# Altium PCB gps_imu2.PcbDoc
Units mm, origin at the board's own origin, x right, y up, seen from the top; angles counter-clockwise.
Board outline 89.6 x 89.6 mm, 2 copper layers (Top Layer, Bottom Layer); 38 components, 27 nets, 161 pads, 0 vias.
Unrouted connection lines stored in the file: 95.
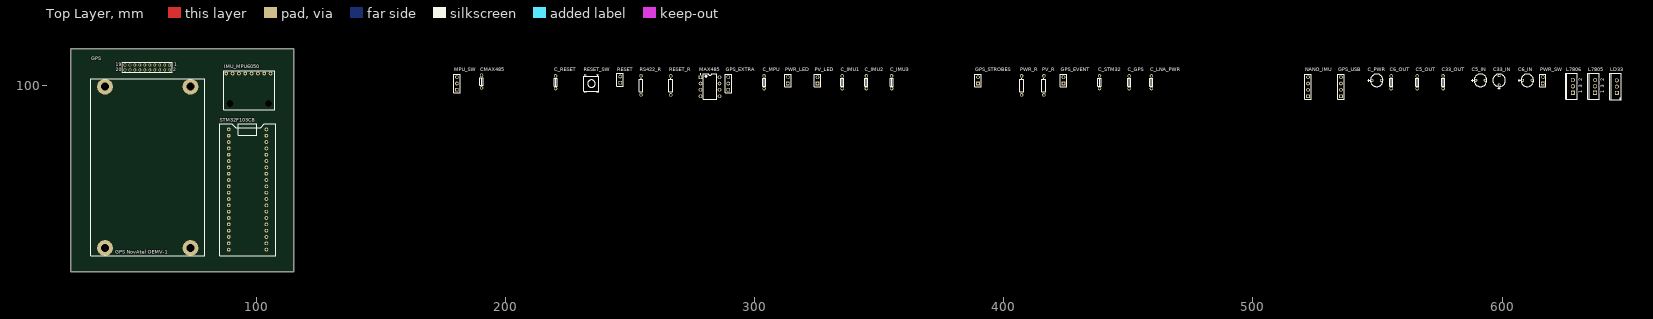
[diagram p0: Top Layer view]
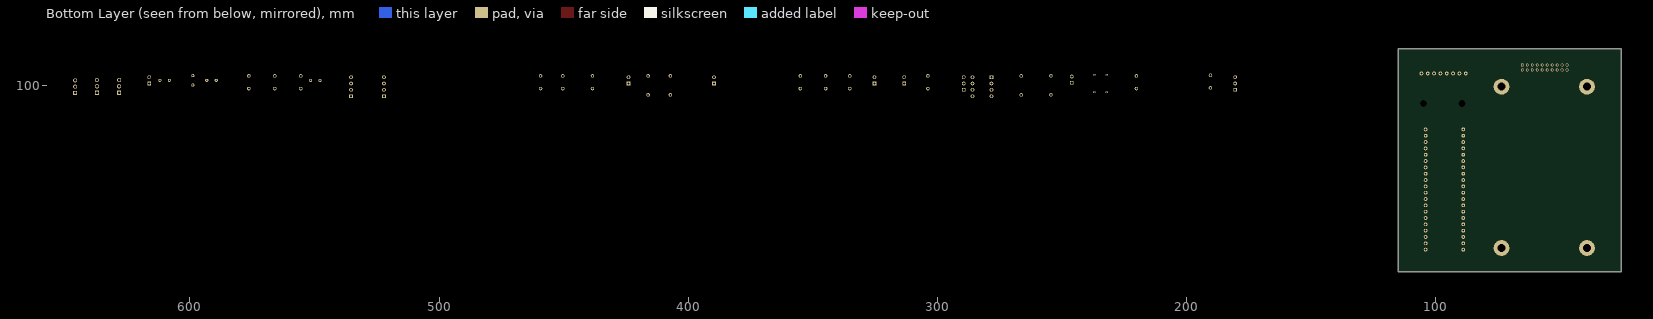
[diagram p1: Bottom Layer view, seen from below]

## Layer stack, top to bottom
Top Solder: solder mask 0.0102, Solder Resist, Dk 3.5
Top Layer: signal copper 0.0356
Dielectric 1: dielectric 0.32, FR-4, Dk 4.8
Bottom Layer: signal copper 0.0356
Bottom Solder: solder mask 0.0102, Solder Resist, Dk 3.5

## Board outline
25.4,25.4 115,25.4 115,115 25.4,115

## Design rules (kind name [scope] priority, off if disabled: settings)
Clearance [All] p1: gap=0.254 ignorepadtopadclearanceinfootprint=FALSE except(0: Arc-Hole Track-Hole SMDPad-Hole THPad-Hole Via-Hole Fill-Hole Poly-Hole Region-Hole Text-Hole)
PolygonConnect [All] p1: connectstyle=Relief reliefconductorwidth=0.254 reliefentries=4 polygonreliefangle="90 Angle" airgapwidth=0.254
RoomDefinition Sheet1 [InComponentClass('Sheet1')] p1: confinementstyle=ConfineIn formatcopy=TRUE lockcomponents=FALSE outline 178.943,27.051 649.351,27.051 649.351,107.823 178.943,107.823
RoutingVias [All] p1: holewidth=0.711 width=1.27 viastyle="Through Hole" minholewidth=0.711 minwidth=1.27 maxholewidth=0.711 maxwidth=1.27
SolderMaskExpansion [All] p1: expansion=0.102
Width [All] p1: maxlimit=0.254 minlimit=0.254 preferedwidth=0.254
30 further rules are at their usual default settings.

## Components (designator, comment, footprint, x,y, rotation, side; value= is the part's Value field where it differs from the comment)
C5_IN "10uF" Capacitor1 589.407,102.235 r0 top
C5_OUT "100nF" C_NANO_HOLES 565.912,98.933 r90 top
C6_IN "10uF" Capacitor1 608.203,102.235 r0 top
C6_OUT "100nF" C_NANO_HOLES 555.498,98.933 r90 top
C33_IN "10uF" Capacitor1 598.805,100.33 r90 top
C33_OUT "100nF" C_NANO_HOLES 576.326,98.933 r90 top
C_GPS "100nF" C_NANO_HOLES 450.342,98.933 r90 top
C_IMU1 "100nF" C_NANO_HOLES 335.153,98.933 r90 top
C_IMU2 "100nF" C_NANO_HOLES 344.805,98.933 r90 top
C_IMU3 "100nF" C_NANO_HOLES 354.965,98.933 r90 top
C_LNA_PWR "100nF" C_NANO_HOLES 459.232,98.933 r90 top
C_MPU "100nF" C_NANO_HOLES 303.784,98.933 r90 top
C_PWR "10uF" Capacitor1 547.751,102.235 r0 top
C_RESET "100nF" C_NANO_HOLES 220.091,98.933 r90 top
C_STM32 "100nF" C_NANO_HOLES 438.404,98.933 r90 top
CMAX485 "100nF" C_NANO_HOLES 190.373,99.187 r90 top
GPS "Header 10X2" GPS_BOARD 46.228,105.41 r0 top
GPS_EVENT "EVENT" HDR1X2 423.926,100.965 r90 top
GPS_EXTRA "EXTRA" HDR1X3 289.433,98.425 r90 top
GPS_STROBES "STROBES" HDR1X2 389.636,100.965 r90 top
GPS_USB "USB" HDR1X4 535.305,95.885 r90 top
IMU_MPU6050 "MPU6050" MPU6050 87.92,105 r270 top
L7805 "L7805ACV" TO220ABN 637.286,99.822 r90 top
L7806 "L7806CV" TO220ABN 628.396,99.822 r90 top
LD33 "LD33V" T03B 646.049,99.695 r90 top
MAX485 "MAX485CPA" PA8 282.067,99.695 r0 top
MPU_SW "Header 3" HDR1X3 180.467,98.425 r90 top
NANO_IMU "Header 4" HDR1X4 522.097,95.885 r90 top
PV_LED "PV" HDR1X2 325.247,100.965 r90 top
PV_R "180" AXIAL-0.3 416.052,100.203 r90 top
PWR_LED "PWR" HDR1X2 313.309,100.965 r90 top
PWR_R "180" AXIAL-0.3 407.162,100.203 r90 top
PWR_SW "Header 2" HDR1X2 616.331,100.965 r90 top
RESET "Header 2" HDR1X2 245.999,101.219 r90 top
RESET_R "4k7" AXIAL-0.3 266.319,100.203 r90 top
RESET_SW "SW-PB" PUSHBUTTON 237.49,97.917 r90 top
RS422_R "120" AXIAL-0.3 254.381,100.203 r90 top
STM32F103C8 "STM32F103C8 Blue Pill" STM32F103C8 85.2,31.74 r0 top

## Footprints (in the part's own frame and the unit in brackets; to place one, negate y for a bottom-side part, rotate by r counter-clockwise, add the part's x,y. Pads: shape width x height; smd on the part's side, far side on the other; paste and mask are expansions set on the pad)
AXIAL-0.3 [mm] "Axial Device, Thru-Hole; 2 Leads; 0.3 in Pin Spacing"
  round 1.4 hole 0.85: 1(-3.81,0) 2(3.81,0)
  silkscreen extent -2.77,-0.76 2.77,0.76
C_NANO_HOLES [mm] "C_NANO com furos maiores"
  round 1.4 hole 0.85: 1(0,0) 2(5.08,0)
  silkscreen extent 1.02,-0.63 4.06,0.64
Capacitor1 [mil]
  round 50 hole 28: 1(0,0) 2(150,0)
  silkscreen extent -69,-100 175,100
GPS_BOARD [mm]
  rect 1.18x1.18 hole 0.71: 1(18.991,2.991)
  round 1.18 hole 0.71: 2(18.991,0.991) 3(16.991,2.991) 4(16.991,0.991) 5(14.991,2.991) 6(14.991,0.991) 7(12.991,2.991) 8(12.991,0.991) 9(10.991,2.991) 10(10.991,0.991) 11(8.991,2.991) 12(8.991,0.991) 13(6.991,2.991) 14(6.991,0.991) 15(4.991,2.991) 16(4.991,0.991) 17(2.991,2.991) 18(2.991,0.991) 19(0.991,2.991) 20(0.991,0.991)
  round 6.35 hole 3.175: 21(27.305,-5.715) 22(-6.985,-5.715) 23(-6.985,-70.485) 24(27.305,-70.485)
  silkscreen extent -12.7,-73.66 33.02,3.99
HDR1X2 [mm] "Connector; Header; 2 Position"
  rect 1.5x1.5 hole 0.9: 1(0,0)
  round 1.5 hole 0.9: 2(2.54,0)
  silkscreen extent -1.27,-1.27 3.81,1.27
HDR1X3 [mm] "Connector; Header; 3 Position"
  rect 1.5x1.5 hole 0.9: 1(0,0)
  round 1.5 hole 0.9: 2(2.54,0) 3(5.08,0)
  silkscreen extent -1.27,-1.27 6.35,1.27
HDR1X4 [mm] "Connector; Header; 4 Position"
  rect 1.5x1.5 hole 0.9: 1(0,0)
  round 1.5 hole 0.9: 2(2.54,0) 3(5.08,0) 4(7.62,0)
  silkscreen extent -1.27,-1.27 8.89,1.27
MPU6050 [mil]
  round 60 hole 30: 0(0,0) 1(0,100) 2(0,200) 3(0,300) 4(0,400) 5(0,500) 6(0,600) 7(0,700)
  round 60 hole 110.24: 9(472.44,59.06) 10(472.44,669.29)
  silkscreen extent -39,-39 571,768
PA8 [mm] "DIP, 8-Leads, Row Spacing 7.62mm, Pitch 2.54mm, Body 9.38x7.24mm"
  rect 1.5x1.5 hole 0.9: 1(-3.81,3.81)
  round 1.5 hole 0.9: 2(-3.81,1.27) 3(-3.81,-1.27) 4(-3.81,-3.81) 5(3.81,-3.81) 6(3.81,-1.27) 7(3.81,1.27) 8(3.81,3.81)
  silkscreen extent -3.93,-5.15 2.65,5.23, body extent -3.6,-5.15 3.6,5.15, height 4.58
PUSHBUTTON [mm]
  oval 0.6x1 hole 0.5: 1(-0.5,5.5) 1(-0.5,0.5) 2(6.5,0.5) 2(6.5,5.5)
  silkscreen extent -0.5,0 6.5,6
STM32F103C8 [mil] "Blue Pill STM32F103C8"
  round 60 hole 30: 1(145.67,100) 2(145.67,200) 3(145.67,300) 4(145.67,400) 5(145.67,500) 6(145.67,600) 7(145.67,700) 8(145.67,800) 9(145.67,900) 10(145.67,1000) 11(145.67,1100) 12(145.67,1200) 13(145.67,1300) 14(145.67,1400) 15(145.67,1500) 16(145.67,1600) 17(145.67,1700) 18(145.67,1800) 19(145.67,1900) 20(145.67,2000) 21(740.16,100) 22(740.16,200) 23(740.16,300) 24(740.16,400) 25(740.16,500) 26(740.16,600) 27(740.16,700) 28(740.16,800) 29(740.16,900) 30(740.16,1000) 31(740.16,1100) 32(740.16,1200) 33(740.16,1300) 34(740.16,1400) 35(740.16,1500) 36(740.16,1600) 37(740.16,1700) 38(740.16,1800) 39(740.16,1900) 40(740.16,2000)
  silkscreen extent 0,0 886,2087
T03B [mm] "TO, Thru-Hole, Vertical, Heatsink Mounted; 3 In-Line Leads; Pitch 2.54 mm"
  rect 1.6x1.6 hole 1: 1(-2.54,0)
  round 1.6 hole 1: 2(0,0) 3(2.54,0)
  silkscreen extent -5.35,-1.85 5.35,2.85, body extent -5.4,-1.9 5.4,2.9, height 19.4
TO220ABN [mm] "TO, Thru-Hole, Vertical, Heatsink Mounted; 3 In-Line Leads; Pitch 2.54 mm; Pin sequence 1, 3, 2"
  rect 1.7x1.7 hole 1.1: 1(-2.54,0)
  round 1.7 hole 1.1: 2(2.54,0) 3(0,0)
  silkscreen extent -5.2,-1.7 5.2,2.9

## Part data
C5_IN C6_IN C33_IN C_PWR: library part "Cap Pol1", "Polarized Capacitor (Radial)", LatestRevisionDate=17-Jul-2002, LatestRevisionNote="Re-released for DXP Platform.", PackageDescription="Polarized Capacitor (Radial); 2 Leads", PackageReference=RB7.6-15, Published=8-Jun-2000, Publisher="Altium Limited"
C5_OUT C6_OUT C33_OUT C_GPS C_IMU1 C_IMU2 C_IMU3 C_LNA_PWR C_MPU C_RESET C_STM32 CMAX485: library part Cap, "Capacitor", LatestRevisionDate=17-Jul-2002, LatestRevisionNote="Re-released for DXP Platform.", PackageReference=RAD-0.3, Published=8-Jun-2000, Publisher="Altium Limited"
GPS: "Header, 10-Pin, Dual row", LatestRevisionDate=17-Jul-2002, LatestRevisionNote="Re-released for DXP Platform.", Publisher="Altium Limited"
GPS_EVENT GPS_STROBES: library part "Header 2", "Header, 2-Pin", LatestRevisionDate=17-Jul-2002, LatestRevisionNote="Re-released for DXP Platform.", Publisher="Altium Limited"
GPS_EXTRA: library part "Header 3", "Header, 3-Pin", LatestRevisionDate=17-Jul-2002, LatestRevisionNote="Re-released for DXP Platform.", Publisher="Altium Limited"
GPS_USB: library part "Header 4", "Header, 4-Pin", LatestRevisionDate=17-Jul-2002, LatestRevisionNote="Re-released for DXP Platform.", Publisher="Altium Limited"
IMU_MPU6050: library part Component_1
L7805: "Precision 1A Regulator", ComponentLink1Description="Manufacturer Link", ComponentLink1URL=http://www.st.com/, ComponentLink2Description=Datasheet, ComponentLink2URL=http://www.st.com/stonline/products/literature/ds/2144/l7805ab.pdf, DatasheetVersion=Nov-1999, LatestRevisionDate=17-Jul-2002, LatestRevisionNote="Re-released for DXP Platform.", Note="Tab is connected to pin 3 (GND).", PackageDescription="TO, Thru-Hole, Vertical, Heatsink Mounted; 3 In-Line Leads; Pitch 2.54 mm; Pin sequence 1, 3, 2", PackageReference=TO220ABN, PackageVersion=Jun-1998, Published=24-Aug-2001, Publisher="Altium Limited"
L7806: "Positive Voltage Regulator", ComponentLink1Description="Manufacturer Link", ComponentLink1URL=http://www.st.com/, DatasheetVersion=Dec-1998, LatestRevisionDate=17-Jul-2002, LatestRevisionNote="Re-released for DXP Platform.", Note="Tab is connected to pin 3 (GND).", PackageDescription="TO, Thru-Hole, Vertical, Heatsink Mounted; 3 In-Line Leads; Pitch 2.54 mm; Pin sequence 1, 3, 2", PackageReference=TO220ABN, PackageVersion=Jun-1998, Published=24-Aug-2001, Publisher="Altium Limited"
LD33: library part LM1117T-3.3, "800mA Low-Dropout Linear Regulator", DigiKeyPartNumber=LM1117T-3.3-ND, Manufacturer="National Semiconductor", PackageTopMarking=NSUZXYTTE#*LM1117T*3.3, ComponentLink1Description="LM1117 Datasheet", ComponentLink1URL=http://www.national.com/ds/LM/LM1117.pdf, ComponentLink2Description="LM1117 Web Page", ComponentLink2URL=http://www.national.com/pf/LM/LM1117.html, ComponentLink3Description="T03B Package Page", ComponentLink3URL=http://www.national.com/packaging/folders/t03b.html, CompType="LDO IC", DatasheetVersion=Apr-2006, PackageDescription="TO-220, Molded, 3 Lead, Straight", PackageReference=T03B, PackageVersion="revL, Jan-1992", PartNumber=LM1117T-3.3, PinCount=3, Published=4-Dec-2008, Publisher="Altium Limited", RoHS=O
MAX485: "Low-Power, Slew-Rate-Limited RS-485/RS-422 Transceiver", Code_JEDEC=MS-001-AB, ComponentLink1Description="Manufacturer Link", ComponentLink1URL=http://www.maxim-ic.com/, ComponentLink2Description=Datasheet, ComponentLink2URL=http://pdfserv.maxim-ic.com/en/ds/MAX1487-MAX491.pdf, DatasheetVersion=Feb-1996, LatestRevisionDate=29-May-2009, LatestRevisionNote="Component Body Added.", PackageDescription="DIP, 8-Pin, Row Spacing 7.62 mm, Pitch 2.54 mm", PackageReference=PA8, PackageVersion="RevB, 21-0043", Published=16-Jan-2001, Publisher="Altium Limited"
MPU_SW: "Header, 3-Pin", LatestRevisionDate=17-Jul-2002, LatestRevisionNote="Re-released for DXP Platform.", Publisher="Altium Limited"
NANO_IMU: "Header, 4-Pin", LatestRevisionDate=17-Jul-2002, LatestRevisionNote="Re-released for DXP Platform.", Publisher="Altium Limited"
PV_LED PWR_LED: library part LED0, "Typical INFRARED GaAs LED", LatestRevisionDate=08-Jul-2005, LatestRevisionNote="Mech Layer 1 removed.", PackageReference=LED-0, Published=8-Jun-2000, Publisher="Altium Limited"
PV_R PWR_R RESET_R RS422_R: library part Res1, "Resistor", LatestRevisionDate=17-Jul-2002, LatestRevisionNote="Re-released for DXP Platform.", PackageReference=AXIAL-0.3, Published=8-Jun-2000, Publisher="Altium Limited"
PWR_SW RESET: "Header, 2-Pin", LatestRevisionDate=17-Jul-2002, LatestRevisionNote="Re-released for DXP Platform.", Publisher="Altium Limited"
RESET_SW: "Switch", LatestRevisionDate=17-Jul-2002, LatestRevisionNote="Re-released for DXP Platform.", PackageReference=SPST-2, Published=24-Mar-1999, Publisher="Altium Limited"
STM32F103C8: library part STM32F103C8

## Nets (pads, with @x,y where several pads share a name; then routed paths per layer and width w, separated by ;. In a path a pad name is that pad's centre, name@x,y a point inside that pad or via, vN(x,y) a via of type N, cw(c..) or ccw(c..) an arc to the next point about the centre after c; other vN are vias at no path point)
3.3V: C33_OUT.1 C_GPS.2 C_STM32.2 GPS.2 LD33.2 MPU_SW.3 PWR_R.2 RESET_R.2 STM32F103C8.1
5V: C5_OUT.1 C33_IN.1 CMAX485.2 GPS_USB.4 L7805.2 LD33.3 MAX485.8 MPU_SW.1
6V: C6_OUT.1 C_IMU1.2 C_IMU2.2 C_IMU3.2 L7806.2 NANO_IMU.1
12V: C5_IN.1 C6_IN.1 C_LNA_PWR.2 C_PWR.1 GPS.1 L7805.1 L7806.1 PWR_SW.1
GND: C5_IN.2 C5_OUT.2 C6_IN.2 C6_OUT.2 C33_IN.2 C33_OUT.2 C_GPS.1 C_IMU1.1 C_IMU2.1 C_IMU3.1 C_LNA_PWR.1 C_MPU.1 C_PWR.2 C_RESET.1 C_STM32.1 CMAX485.1 GPS.10 GPS.13 GPS.16 GPS.18 GPS_USB.1 IMU_MPU6050.1 L7805.3 L7806.3 LD33.1 MAX485.2 MAX485.3 MAX485.4 MAX485.5 NANO_IMU.2 PV_LED.2 PWR_LED.2 PWR_SW.2 RESET.2 RESET_SW.1 STM32F103C8.2 STM32F103C8.39 STM32F103C8.40
GPS_CAN2_RX: GPS.8 GPS_EXTRA.2
GPS_CAN2_TX: GPS.20 GPS_EXTRA.3
GPS_COM1_RX: GPS.12 STM32F103C8.28
GPS_COM1_TX: GPS.11 STM32F103C8.27
GPS_COM2_RX: GPS.15 STM32F103C8.36
GPS_COM2_TX: GPS.14 STM32F103C8.35
GPS_Event1: GPS.9 GPS_EVENT.1
GPS_Event2: GPS.7 GPS_EVENT.2
GPS_PPS: GPS.19 GPS_STROBES.2
GPS_PV: GPS.17 GPS_STROBES.1 PV_R.2
GPS_RESETIN: C_RESET.2 GPS.5 RESET.1 RESET_R.1 RESET_SW.2
GPS_USB_D+: GPS.4 GPS_USB.3
GPS_USB_D-: GPS.3 GPS_USB.2
GPS_VARF: GPS.6 GPS_EXTRA.1
IMU_HRS_A: MAX485.6 NANO_IMU.3 RS422_R.1
IMU_HRS_B: MAX485.7 NANO_IMU.4 RS422_R.2
IMU_TX: MAX485.1 STM32F103C8.14
MPU_VIN: C_MPU.2 IMU_MPU6050.0 MPU_SW.2
NetPV_LED_1: PV_LED.1 PV_R.1
NetPWR_LED_1: PWR_LED.1 PWR_R.1
SCL_MPU6050: IMU_MPU6050.2 STM32F103C8.7
SDA_MPU6050: IMU_MPU6050.3 STM32F103C8.6
pads on no net: GPS.21 GPS.22 GPS.23 GPS.24 IMU_MPU6050.4 IMU_MPU6050.5 IMU_MPU6050.6 IMU_MPU6050.7 IMU_MPU6050.9 IMU_MPU6050.10 STM32F103C8.3 STM32F103C8.4 STM32F103C8.5 STM32F103C8.8 STM32F103C8.9 STM32F103C8.10 STM32F103C8.11 STM32F103C8.12 STM32F103C8.13 STM32F103C8.15 STM32F103C8.16 STM32F103C8.17 STM32F103C8.18 STM32F103C8.19 STM32F103C8.20 STM32F103C8.21 STM32F103C8.22 STM32F103C8.23 STM32F103C8.24 STM32F103C8.25 STM32F103C8.26 STM32F103C8.29 STM32F103C8.30 STM32F103C8.31 STM32F103C8.32 STM32F103C8.33 STM32F103C8.34 STM32F103C8.37 STM32F103C8.38

## Text inside footprints (layer, text, board x,y; h text height)
GPS: Top Overlay "GPS NovAtel OEMV-1" at 43.307,32.639 h1.52; Top Overlay "2" at 66.719,105.901 h1.27; Top Overlay "1" at 66.93,107.901 h1.27; Top Overlay "19" at 43.613,107.901 h1.27; Top Overlay "20" at 43.507,105.901 h1.27
L7805: Top Overlay "1" at 640.961,97.032 h1.5 r90; Top Overlay "2" at 640.961,101.862 h1.5 r90; Top Overlay "3" at 640.961,99.322 h1.5 r90
L7806: Top Overlay "1" at 632.071,97.032 h1.5 r90; Top Overlay "2" at 632.071,101.862 h1.5 r90; Top Overlay "3" at 632.071,99.322 h1.5 r90